# Altium PCB baseboard.PcbDoc
Units mm, origin at the board's own origin, x right, y up, seen from the top; angles counter-clockwise.
Board outline 284.99 x 215.65 mm, 2 copper layers (Top Layer, Bottom Layer); 35 components, 138 nets, 196 pads, 18 vias.
Unrouted connection lines stored in the file: 1.
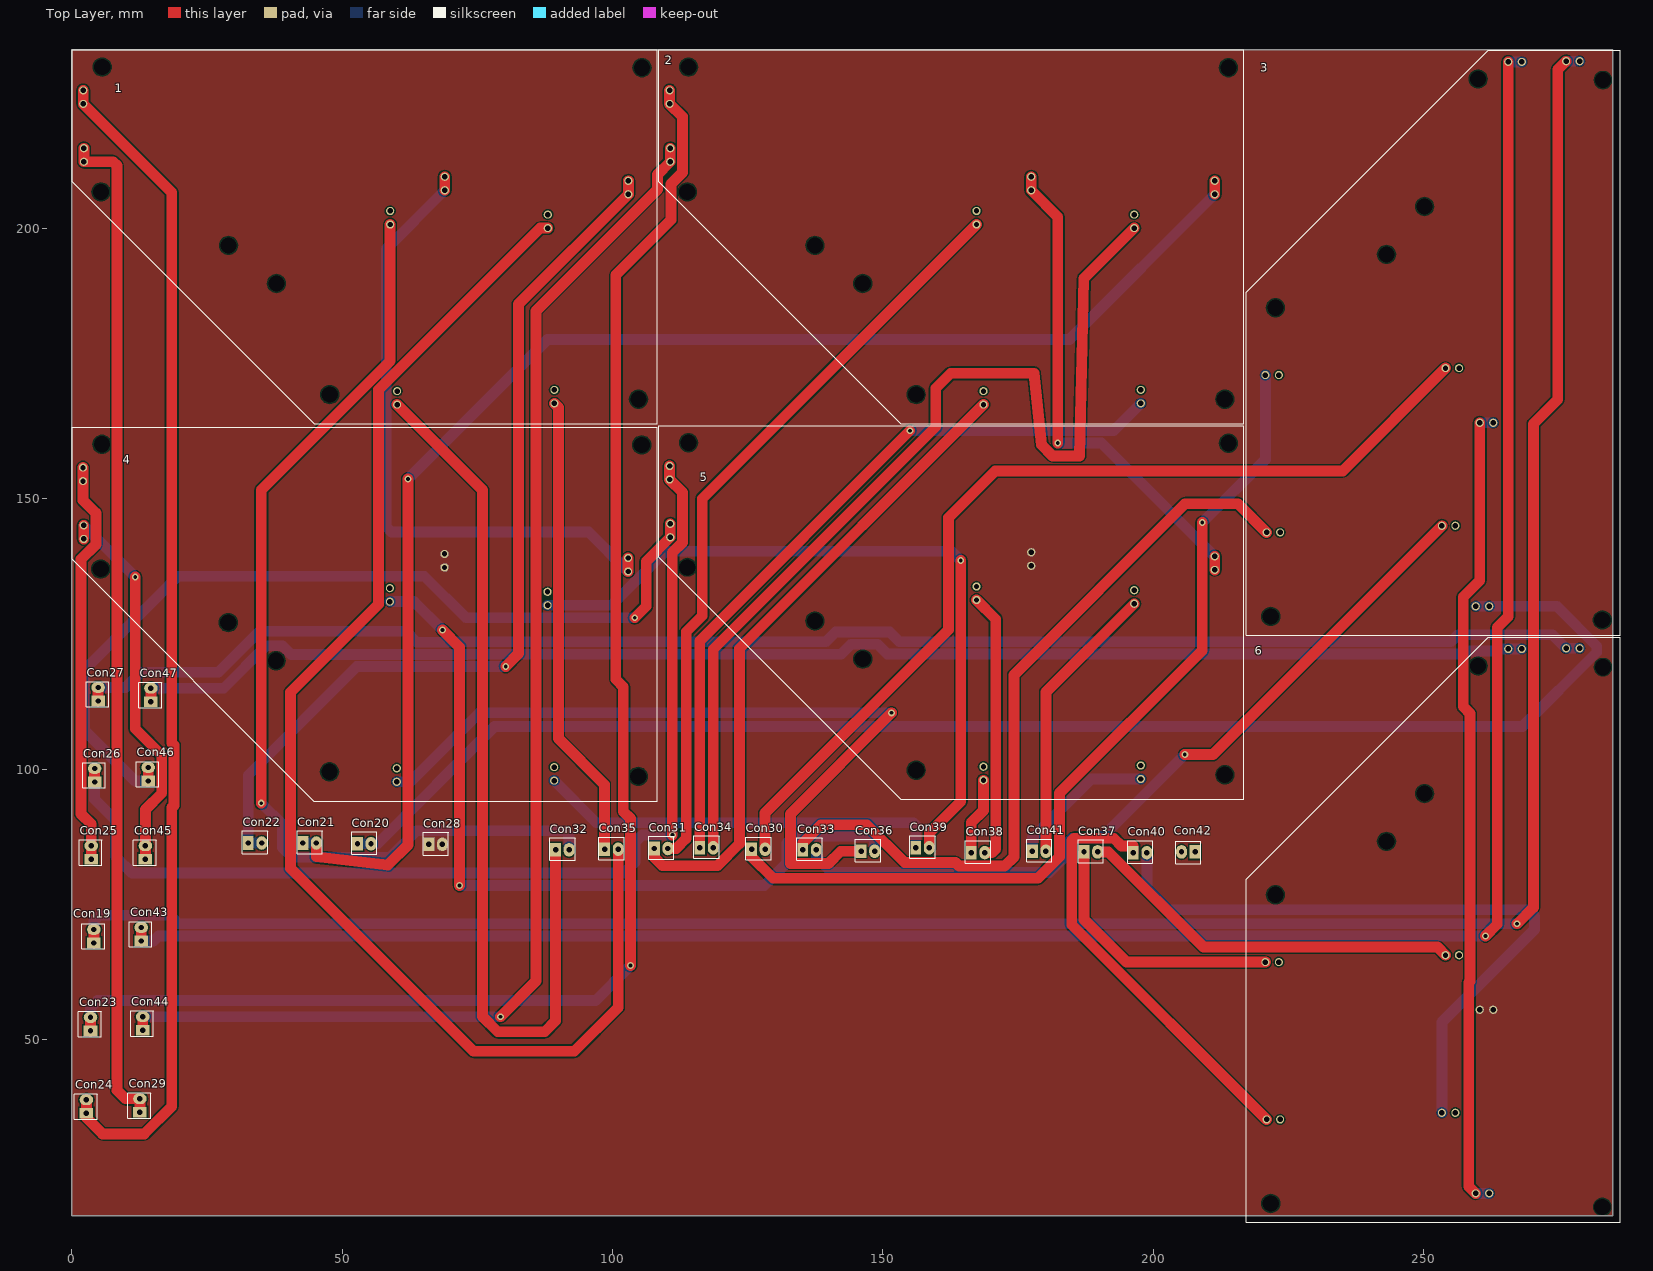
[diagram p0: Top Layer view]
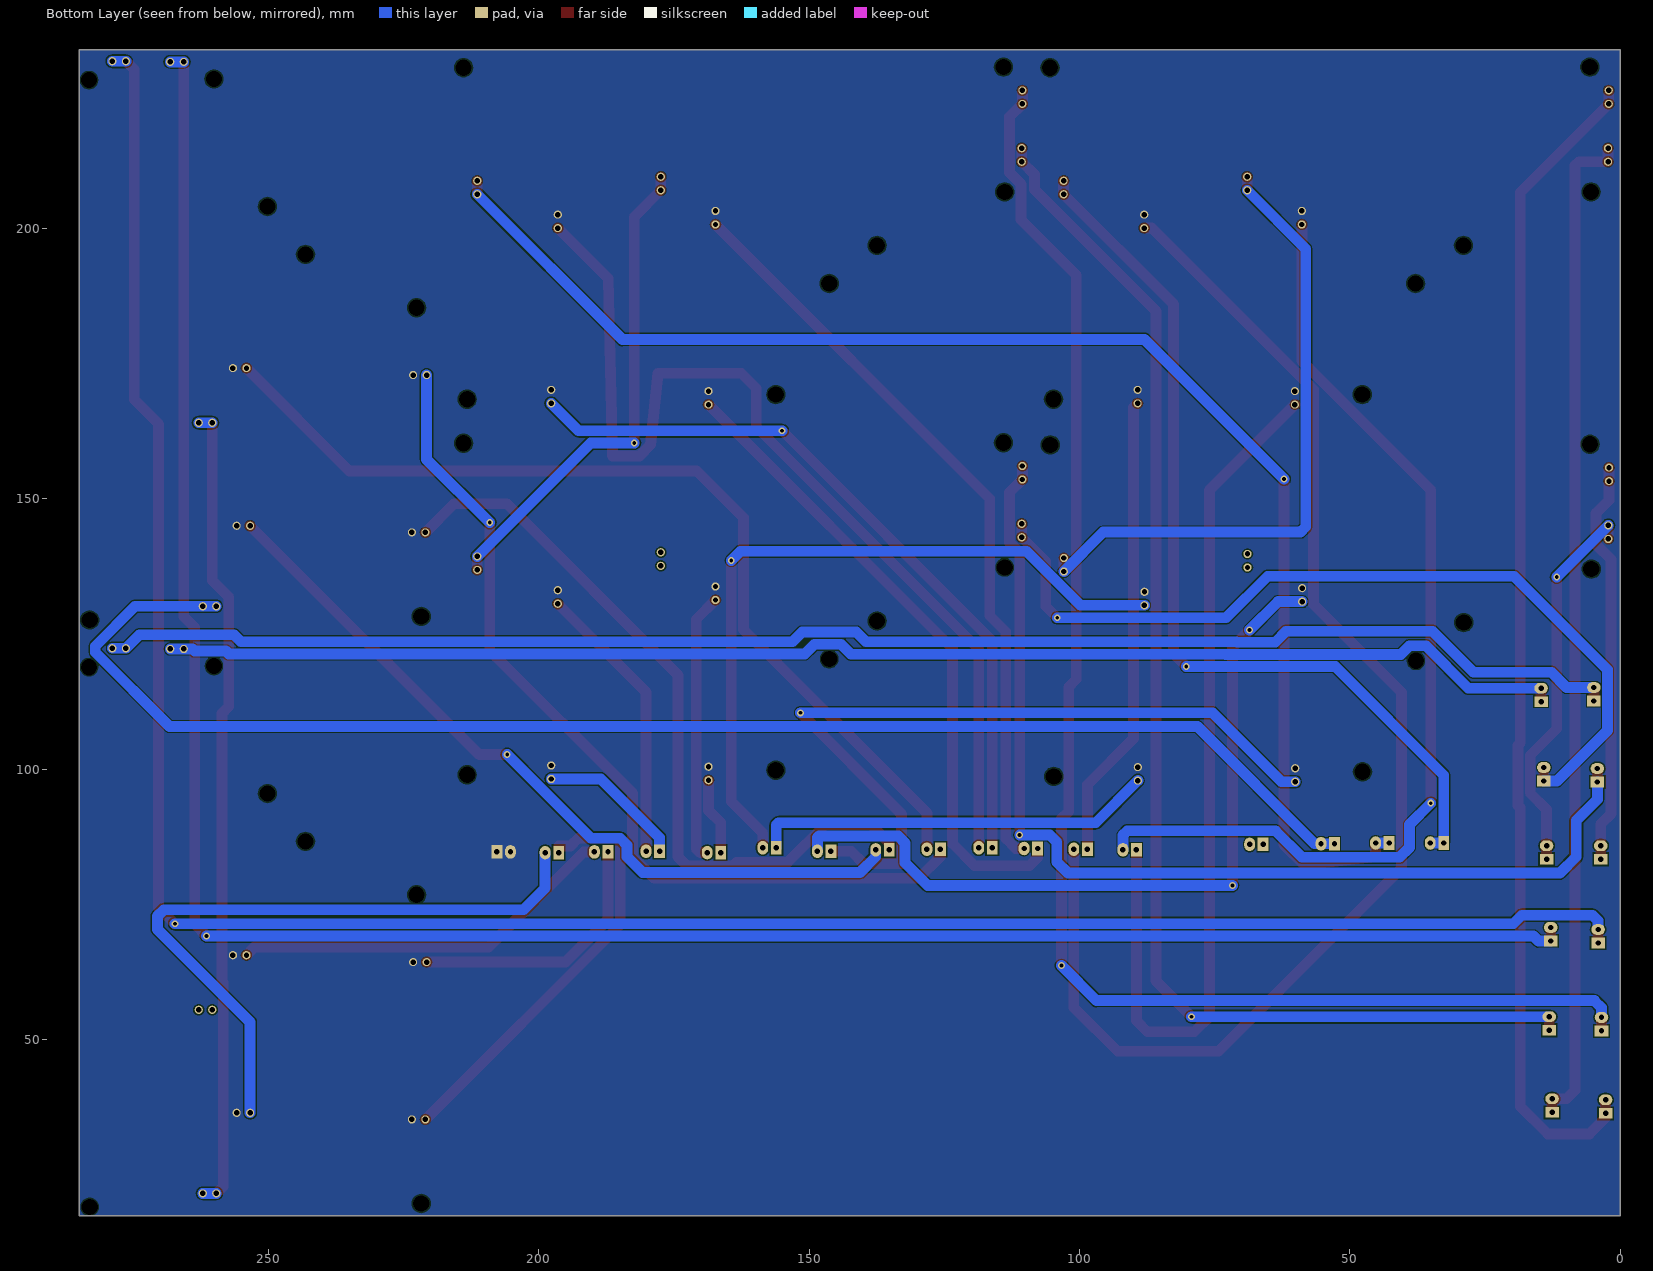
[diagram p1: Bottom Layer view, seen from below]
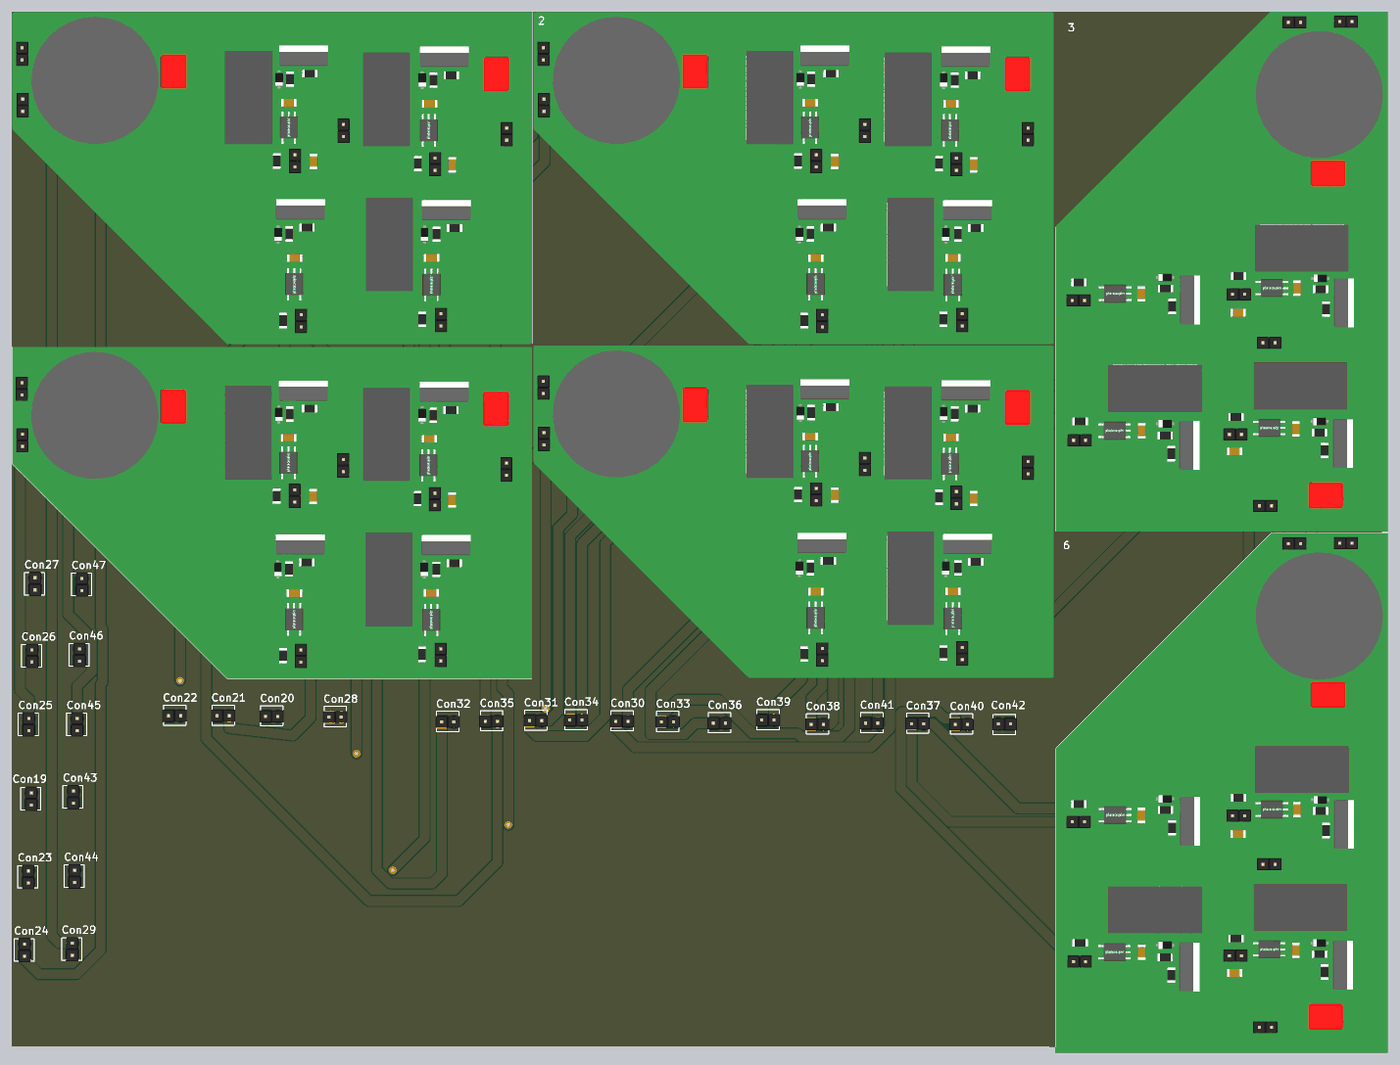
[diagram p2: 3D render of the assembled board from above, using the file's embedded part models]

## Layer stack, top to bottom
Top Solder: solder mask 0.0102, Solder Resist, Dk 3.5
Top Layer: signal copper 0.0356
Dielectric 1: dielectric 0.32, FR-4, Dk 4.8
Bottom Layer: signal copper 0.0356
Bottom Solder: solder mask 0.0102, Solder Resist, Dk 3.5

## Board outline
0,17.399 0,233.045 284.988,233.045 284.988,17.399

## Design rules (kind name [scope] priority, off if disabled: settings)
Clearance [All] p1: gap=0.254 ignorepadtopadclearanceinfootprint=FALSE except(0: Arc-Hole Track-Hole SMDPad-Hole THPad-Hole Via-Hole Fill-Hole Poly-Hole Region-Hole Text-Hole)
Height [All] p1: minheight=0 maxheight=254 prefheight=12.7
PolygonConnect [All] p1: connectstyle=Direct reliefconductorwidth=0.254 reliefentries=4 polygonreliefangle="90 Angle" airgapwidth=0.254
RoutingVias [All] p1: holewidth=0.711 width=1.27 viastyle="Through Hole" minholewidth=0.711 minwidth=1.27 maxholewidth=0.711 maxwidth=1.27
SolderMaskExpansion [All] p1: expansion=0.102 istentingtop=FALSE
Width [All] p1: maxlimit=2 minlimit=2 preferedwidth=2 minimp=50.000000 maximp=50.000000 favimp=50.000000
29 further rules are at their usual default settings.

## Components (designator, comment, footprint, x,y, rotation, side; value= is the part's Value field where it differs from the comment)
1 "mliBoard" PCBComponent_1 0.063,208.645 r0 top
2 "mliBoard" PCBComponent_1 108.521,208.645 r0 top
3 "mliBoard" PCBComponent_1 261.94,232.989 r270 top
4 "mliBoard" PCBComponent_1 0.013,138.877 r0 top
5 "mliBoard" PCBComponent_1 108.521,139.176 r0 top
6 "mliBoard" PCBComponent_1 261.94,124.404 r270 top
Con19 "Connector2" Conn 4.063,67.883 r180 top
Con20 "Connector2" Conn 52.832,86.233 r90 top
Con21 "Connector2" Conn 42.737,86.36 r90 top
Con22 "Connector2" Conn 32.639,86.36 r90 top
Con23 "Connector2" Conn 3.429,51.627 r180 top
Con24 "Connector2" Conn 2.667,36.387 r180 top
Con25 "Connector2" Conn 3.556,83.377 r180 top
Con26 "Connector2" Conn 4.191,97.663 r180 top
Con27 "Connector2" Conn 4.826,112.649 r180 top
Con28 "Connector2" Conn 66.04,86.106 r90 top
Con29 "Connector2" Conn 12.573,36.576 r180 top
Con30 "Connector2" Conn 125.73,85.217 r90 top
Con31 "Connector2" Conn 107.761,85.344 r90 top
Con32 "Connector2" Conn 89.473,85.09 r90 top
Con33 "Connector2" Conn 135.193,85.09 r90 top
Con34 "Connector2" Conn 116.143,85.471 r90 top
Con35 "Connector2" Conn 98.552,85.217 r90 top
Con36 "Connector2" Conn 145.988,84.836 r90 top
Con37 "Connector2" Conn 187.223,84.709 r90 top
Con38 "Connector2" Conn 166.37,84.582 r90 top
Con39 "Connector2" Conn 156.083,85.471 r90 top
Con40 "Connector2" Conn 196.342,84.582 r90 top
Con41 "Connector2" Conn 177.673,84.836 r90 top
Con42 "Connector2" Conn 207.707,84.709 r270 top
Con43 "Connector2" Conn 12.827,68.264 r180 top
Con44 "Connector2" Conn 13.081,51.754 r180 top
Con45 "Connector2" Conn 13.589,83.377 r180 top
Con46 "Connector2" Conn 14.097,97.855 r180 top
Con47 "Connector2" Conn 14.605,112.522 r180 top

## Footprints (in the part's own frame and the unit in brackets; to place one, negate y for a bottom-side part, rotate by r counter-clockwise, add the part's x,y. Pads: shape width x height; smd on the part's side, far side on the other; paste and mask are expansions set on the pad)
Conn [mm]
  rect 2.5x2 hole 1: 1(0,0.025)
  oval 2.5x2 hole 1: 2(0,-2.475)
  silkscreen extent -1.96,-3.58 2.22,1.1, body extent -5,-3.74 1.3,1.34, height 8.15
PCBComponent_1 [mm]
  round 1.524 hole 1: 1(2.025,14.425) 1(2.025,16.925) 2(2.15,3.725) 2(2.15,6.225) 3(58.791,-5.375) 4(58.791,-7.875) 5(60.075,-38.7) 6(60.075,-41.2) 7(87.95,-6.05) 8(87.954,-8.55) 9(89.175,-38.475) 10(89.175,-40.975) 11(68.9,-1.55) 11(68.9,0.95) 12(102.85,-2.3) 12(102.85,0.2)
  round 1.524 hole 3: 15(5.3,-1.85) 15(5.525,21.225) 15(28.9,-11.75) 15(37.75,-18.8) 15(47.625,-39.35) 15(104.725,-40.2) 15(105.375,21.125)
  silkscreen extent 0,-44.75 108.2,24.4, body extent 0,-44.86 108.2,24.29, height 32

## Part data
Con19 Con20 Con21 Con22 Con23 Con24 Con25 Con26 Con27 Con28 Con29 Con30 Con31 Con32 Con33 Con34 Con35 Con36 Con37 Con38 Con39 Con40 Con41 Con42 Con43 Con44 Con45 Con46 Con47: System=Connector

## Via types
v1: diameter 1.27, hole 0.711, Top Layer to Bottom Layer, 18 vias

## Nets (pads, with @x,y where several pads share a name; then routed paths per layer and width w, separated by ;. In a path a pad name is that pad's centre, name@x,y a point inside that pad or via, vN(x,y) a via of type N, cw(c..) or ccw(c..) an arc to the next point about the centre after c; other vN are vias at no path point)
1: 
12v: 
12v_1: 1.1 Con24.1 Con24.2 | length 217.5
  Top Layer w2: 1.1@2.088,225.57 2.088,223.07 18.466,206.692 18.466,104.838 18.855,104.449 18.855,93.322 18.466,92.933 18.466,37.643 13.386,32.563 5.664,32.563 2.667,35.56 Con24.1 2.667,37.592 Con24.2
12v_2: 2.1 Con23.1 Con23.2 | length 276.5
  Top Layer w2: Con23.1 Con23.2 ; v1(103.302,63.678) 103.302,90.881 101.981,92.202 101.981,115.24 100.584,116.637 100.584,191.401 110.82,201.637 110.82,208.28 112.928,210.388 112.928,220.688 110.546,223.07 2.1@110.546,225.57
  Bottom Layer w2: Con23.2 3.429,55.88 4.75,57.201 96.825,57.201 v1(103.302,63.678)
12v_3: 3.1 Con19.1 Con19.2 | length 434.2
  Top Layer w2: Con19.1 Con19.2 ; v1(267.31,71.425) 270.307,74.422 270.307,163.881 274.828,168.402 274.828,229.427 3.1@276.365,230.964
  Bottom Layer w2: Con19.2 4.063,71.982 5.08,73 18.161,73 19.736,71.425 v1(267.31,71.425) ; 3.1@276.365,230.964 3.1@278.865,230.964
12v_4: 4.1 Con25.1 Con25.2 | length 75.4
  Top Layer w2: 4.1@2.038,155.802 2.038,153.302 2.038,149.753 4.42,147.371 4.42,141.58 1.676,138.836 1.676,91.745 3.556,89.865 Con25.2 Con25.1
12v_5: 5.1 Con26.1 Con26.2 | length 197.2
  Top Layer w2: Con26.1 Con26.2 ; 5.1@110.546,156.101 110.546,153.601 112.928,151.219 112.928,141.961 111.049,140.081 v1(111.049,87.848)
  Bottom Layer w2: Con26.1 4.191,94.437 8.103,90.526 8.103,83.82 11.125,80.797 102.133,80.797 104.191,82.855 104.191,86.553 105.486,87.848 v1(111.049,87.848)
12v_6: 6.1 Con27.1 Con27.2 | length 284.8
  Top Layer w2: Con27.1 Con27.2
  Bottom Layer w2: Con27.2 9.895,115.124 12.703,117.932 27.09,117.932 34.678,125.52 61.763,125.52 63.789,123.494 70.868,123.494 70.97,123.596 139.475,123.596 141.263,125.384 151.279,125.384 153.067,123.596 255.082,123.596 256.377,124.892 273.852,124.892 276.365,122.379 6.1@278.865,122.379
15v: 
15v_2: 
24v_1: 
24v_2: 
+15v: 
+15v1: 
+15v2: 
+15v3: 
+15v4: 
+15v5: 
-5v: 
-5v1: 
-5v2: 
-5v3: 
-5v4: 
-5v5: 
GND: 1.3 1.5 1.7 1.9 2.3 2.5 2.7 2.9 3.3 3.5 3.7 3.9 4.3 4.5 4.7 4.9 5.3 5.5 5.7 5.9 6.3 6.5 6.7 6.9 Con42.1 Con42.2
gnd4: 
gnd5: 1.2 Con29.1 Con29.2 | length 187.3
  Top Layer w2: 1.2@2.213,214.87 2.213,212.37 7.594,212.37 8.306,211.658 8.306,40.64 9.895,39.051 Con29.2 Con29.1
gnd_: 
GND_2: 2.2 Con44.1 Con44.2 | length 242.3
  Top Layer w2: Con44.1 Con44.2 ; v1(79.248,54.229) 85.852,60.833 85.852,184.785 108.306,207.239 108.306,210.005 110.671,212.37 2.2@110.671,214.87
  Bottom Layer w2: Con44.2 v1(79.248,54.229)
GND_3: 3.2 Con43.1 Con43.2 | length 417.4
  Top Layer w2: Con43.1 Con43.2 ; v1(261.468,69.164) 263.627,71.323 263.627,126.213 265.659,128.245 265.659,228.473 265.665,228.479 3.2@265.665,230.839
  Bottom Layer w2: Con43.1 15.088,68.239 16.013,69.164 v1(261.468,69.164) ; 3.2@265.665,230.839 3.2@268.165,230.839
GND_4: 4.2 Con45.1 Con45.2 | length 71.5
  Top Layer w2: 4.2@2.163,142.602 4.2@2.163,145.102 ; v1(11.709,135.555) 11.709,107.482 16.601,102.591 16.601,95.58 13.589,92.568 Con45.2 13.589,84.582 Con45.1
  Bottom Layer w2: 4.2@2.163,145.102 v1(11.709,135.555)
GND_5: 5.2 Con46.1 Con46.2 | length 161.7
  Top Layer w2: Con46.1 Con46.2 ; v1(104.089,128.016) 106.223,130.15 106.223,138.453 110.671,142.901 5.2@110.671,145.401
  Bottom Layer w2: Con46.1 11.633,97.83 2.311,107.152 2.311,118.415 19.609,135.712 65.176,135.712 72.873,128.016 v1(104.089,128.016)
GND_6: 6.2 Con47.1 Con47.2 | length 261.9
  Top Layer w2: Con47.1 Con47.2
  Bottom Layer w2: Con47.2 28.078,114.997 35.912,122.831 38.967,122.831 40.558,121.24 72.989,121.24 73.034,121.285 142.24,121.285 144.085,123.13 149.022,123.13 150.816,121.336 257.327,121.336 257.85,121.858 263.622,121.858 264.018,122.254 265.665,122.254 6.2@268.165,122.254
H1_1: 
H1_2: 
H2_1: 
H2_2: 
L1_1: 
L1_2: 
L2_1: 
L2_2: 
Net1_4: 1.4 Con32.2 | length 185.6
  Top Layer w2: v1(35.001,93.726) 35.001,151.651 58.854,175.503 1.4
  Bottom Layer w2: v1(35.001,93.726) 38.938,89.789 38.938,85.547 40.767,83.718 58.852,83.718 63.754,88.621 91.161,88.621 91.948,87.833 Con32.2
Net1_6: 1.6 Con32.1 | length 166.9
  Top Layer w2: 1.6 75.946,151.637 75.946,54.254 78.74,51.46 87.441,51.46 89.448,53.467 Con32.1
Net1_8: 1.8 Con35.2 | length 246.2
  Top Layer w2: 1.8 86.633,200.095 56.718,170.18 56.718,130.531 40.437,114.249 40.437,81.686 74.295,47.828 92.913,47.828 101.027,55.942 Con35.2
Net1_10: 1.10 Con35.1 | length 86.3
  Top Layer w2: 1.10 89.992,166.916 89.992,105.664 98.527,97.129 Con35.1
Net1_11: 1.11 4.12 | length 119.9
  Top Layer w2: 1.11@68.963,207.095 1.11@68.963,209.595 ; 4.12@102.863,136.577 4.12@102.863,139.077
  Bottom Layer w2: 1.11@68.963,207.095 58.115,196.247 58.115,144.856 59.106,143.866 95.574,143.866 4.12@102.863,136.577
Net1_12: 1.12 Con22.1 Con22.2 | length 170.2
  Top Layer w2: v1(80.239,119.024) 82.601,121.387 82.601,186.033 102.913,206.345 1.12@102.913,208.845
  Bottom Layer w2: Con22.2 Con22.1 32.614,98.908 52.692,118.986 80.2,118.986 v1(80.239,119.024)
Net2_4: 2.4 Con31.2 | length 140
  Top Layer w2: Con31.2 111.76,85.344 113.637,87.221 113.637,125.44 116.586,128.389 116.586,150.044 2.4
Net2_6: 2.6 Con31.1 | length 119.6
  Top Layer w2: Con31.1 107.736,83.653 109.22,82.169 119.38,82.169 123.444,86.233 123.444,122.293 2.6
Net2_8: 2.8 Con34.2 | length 188.6
  Top Layer w2: Con34.2 118.618,122.199 159.766,163.347 159.766,170.459 162.56,173.253 177.927,173.253 179.324,160.02 181.381,157.963 186.36,157.963 187.147,190.767 2.8
Net2_10: 2.10 Con34.1 | length 138
  Top Layer w2: Con34.1 116.118,123.751 v1(154.978,162.611)
  Bottom Layer w2: v1(154.978,162.611) 192.637,162.611 2.10
Net2_11: 2.11 5.12 | length 91.5
  Top Layer w2: 2.11@177.421,209.595 177.421,207.095 182.347,202.169 v1(182.347,160.35) ; 5.12@211.371,136.876 5.12@211.371,139.376
  Bottom Layer w2: v1(182.347,160.35) 190.397,160.35 5.12@211.371,139.376
Net2_12: 2.12 Con21.1 Con21.2 | length 264.8
  Top Layer w2: Con21.2 45.212,83.82 58.42,82.271 62.128,85.979 v1(62.128,153.67) ; 2.12@211.371,206.345 2.12@211.371,208.845
  Bottom Layer w2: Con21.1 Con21.2 ; v1(62.128,153.67) 87.935,179.476 184.502,179.476 2.12@211.371,206.345
Net3_4: 3.4 Con30.2 | length 178.8
  Top Layer w2: Con30.2 128.205,91.883 162.128,125.806 162.128,146.532 170.79,155.194 235.061,155.194 3.4
Net3_6: 3.6 Con30.1 | length 166.5
  Top Layer w2: Con30.1 125.705,83.82 129.701,79.824 178.681,79.824 182.677,83.82 182.677,95.587 209.067,121.978 v1(209.067,145.644)
  Bottom Layer w2: v1(209.067,145.644) 220.74,157.316 3.6
Net3_8: 3.8 Con33.2 | length 146
  Top Layer w2: v1(205.842,102.718) 211.073,102.718 3.8
  Bottom Layer w2: Con33.2 137.668,83.82 140.564,80.924 180.772,80.924 183.667,83.82 183.667,85.954 184.937,87.224 190.348,87.224 v1(205.842,102.718)
Net3_10: 3.10 Con33.1 | length 141.3
  Top Layer w2: Con33.1 135.168,86.36 138.546,89.738 147.015,89.738 154.026,82.728 163.434,82.728 164.084,82.078 172.502,82.078 174.219,83.795 174.219,117.424 205.892,149.098 215.681,149.098 3.10
Net3_11: 3.11 6.12 | length 150
  Top Layer w2: 6.12@259.64,21.554 258.369,22.825 258.369,60.554 258.597,60.782 258.597,110.312 257.327,111.582 257.327,131.877 260.39,134.939 3.11@260.39,164.089
  Bottom Layer w2: 6.12@259.64,21.554 6.12@262.14,21.554 ; 3.11@260.39,164.089 3.11@262.89,164.089
Net3_12: 3.12 Con20.1 Con20.2 | length 270.5
  Bottom Layer w2: Con20.1 Con20.2 56.515,86.233 78.181,107.899 268.29,107.899 282.042,121.65 282.042,122.758 274.661,130.139 262.14,130.139 3.12@259.64,130.139
Net4_4: 4.4 Con36.2 | length 145.8
  Top Layer w2: v1(68.529,125.755) 71.704,122.58 v1(71.704,78.511)
  Bottom Layer w2: 4.4 63.283,131.002 v1(68.529,125.755) ; v1(71.704,78.511) 128.041,78.511 132.232,82.702 132.232,86.36 133.502,87.63 148.184,87.63 148.463,87.351 Con36.2
Net4_6: 4.6 Con36.1 | length 146.4
  Top Layer w2: Con36.1 142.189,84.836 139.929,82.575 132.893,82.575 132.893,91.745 v1(151.587,110.439)
  Bottom Layer w2: 4.6 62.6,97.677 75.362,110.439 v1(151.587,110.439)
Net4_8: 4.8 Con39.2 | length 136.8
  Top Layer w2: Con39.2 158.558,88.203 164.389,94.034 v1(164.389,138.608)
  Bottom Layer w2: 4.8 99.822,130.327 109.804,140.31 162.687,140.31 v1(164.389,138.608)
Net4_10: 4.10 Con39.1 | length 74.5
  Bottom Layer w2: 4.10 96.988,90.102 155.643,90.102 156.058,89.687 Con39.1
Net4_11: 4.11 5.11 6.11 Con28.1 Con28.2
Net5_4: 5.4 Con38.2 | length 49.8
  Top Layer w2: 5.4 170.866,127.747 170.866,85.268 170.18,84.582 Con38.2
Net5_6: 5.6 Con38.1 | length 14.3
  Top Layer w2: Con38.1 166.345,90.145 168.596,92.396 5.6
Net5_8: 5.8 Con41.2 | length 52.6
  Top Layer w2: Con41.2 180.148,114.299 5.8
Net5_10: 5.10 Con41.1 | length 27
  Bottom Layer w2: Con41.1 177.648,87.326 188.523,98.201 5.10
Net6_4: 6.4 Con37.2 | length 72.3
  Top Layer w2: Con37.2 191.694,84.709 209.302,67.1 252.578,67.1 6.4
Net6_6: 6.6 Con37.1 | length 49.3
  Top Layer w2: Con37.1 187.198,72.187 195.056,64.329 6.6
Net6_8: 6.8 Con40.2 | length 123.9
  Bottom Layer w2: Con40.2 198.817,78.018 202.819,74.016 269.342,74.016 270.51,72.847 270.51,70.358 253.39,53.238 6.8
Net6_10: 6.10 Con40.1 | length 79.9
  Top Layer w2: Con40.1 196.317,85.801 194.132,85.801 192.71,87.224 185.324,87.224 184.937,86.837 184.937,71.257 6.10
NetC1_1: 
NetC1_2: 
NetC4_1: 
NetC5_1: 
NetC5_2: 
NetC9_1: 
NetC10_1: 
NetC10_2: 
NetC13_1: 
NetC21_1: 
NetC21_2: 
NetC23_1: 
NetC25_1: 
NetC28_1: 
NetC28_2: 
NetC31_1: 
NetC35_1: 
NetC35_2: 
NetCon9_1: 
NetCon9_2: 
NetCon10_1: 
NetCon10_2: 
NetCon16_1: 
NetCon16_2: 
NetCon17_1: 
NetCon17_2: 
NetD1_a: 
NetD1_k: 
NetD2_a: 
NetD2_k: 
NetD3_a: 
NetD3_k: 
NetD5_a: 
NetD5_k: 
NetD7_a: 
NetD7_k: 
NetD8_a: 
NetD8_k: 
NetD9_a: 
NetD9_k: 
NetD10_a: 
NetD10_k: 
NetD12_a: 
NetD12_k: 
NetD13_a: 
NetD13_k: 
NetD14_a: 
NetD14_k: 
NetD15_a: 
NetD15_k: 
NetD17_a: 
NetD17_k: 
NetD18_a: 
NetD18_k: 
NetD19_a: 
NetD19_k: 
NetD20_a: 
NetD20_k: 
NetR1_2: 
NetR2_2: 
NetR7_2: 
NetR8_2: 
NetR31_2: 
NetR32_2: 
NetR39_2: 
NetR40_2: 
pads on no net: 1.15 2.15 3.15 4.15 5.15 6.15

## Polygon pours and split planes (outlines as drawn)
GND on Bottom Layer "GND_L02_P000" (solid, pour order 0): 0,233.045 284.988,233.045 284.988,17.399 0,17.399
Net4_11 on Top Layer "NET4_11_L01_P001" (solid, pour order 1): 0,233.045 284.988,233.045 284.988,17.399 0,17.399

## Silkscreen, mask and mechanical layers (free items; w line width, h text height)
Mechanical 1:
  the board outline again, w0.254